# Altium PCB 多功能数字电表.PcbDoc
Units mil, origin at the board's own origin, x right, y up, seen from the top; angles counter-clockwise.
Board outline 2316.22 x 2761.4 mil, 2 copper layers (Top Layer, Bottom Layer); 30 components, 39 nets, 125 pads, 0 vias.
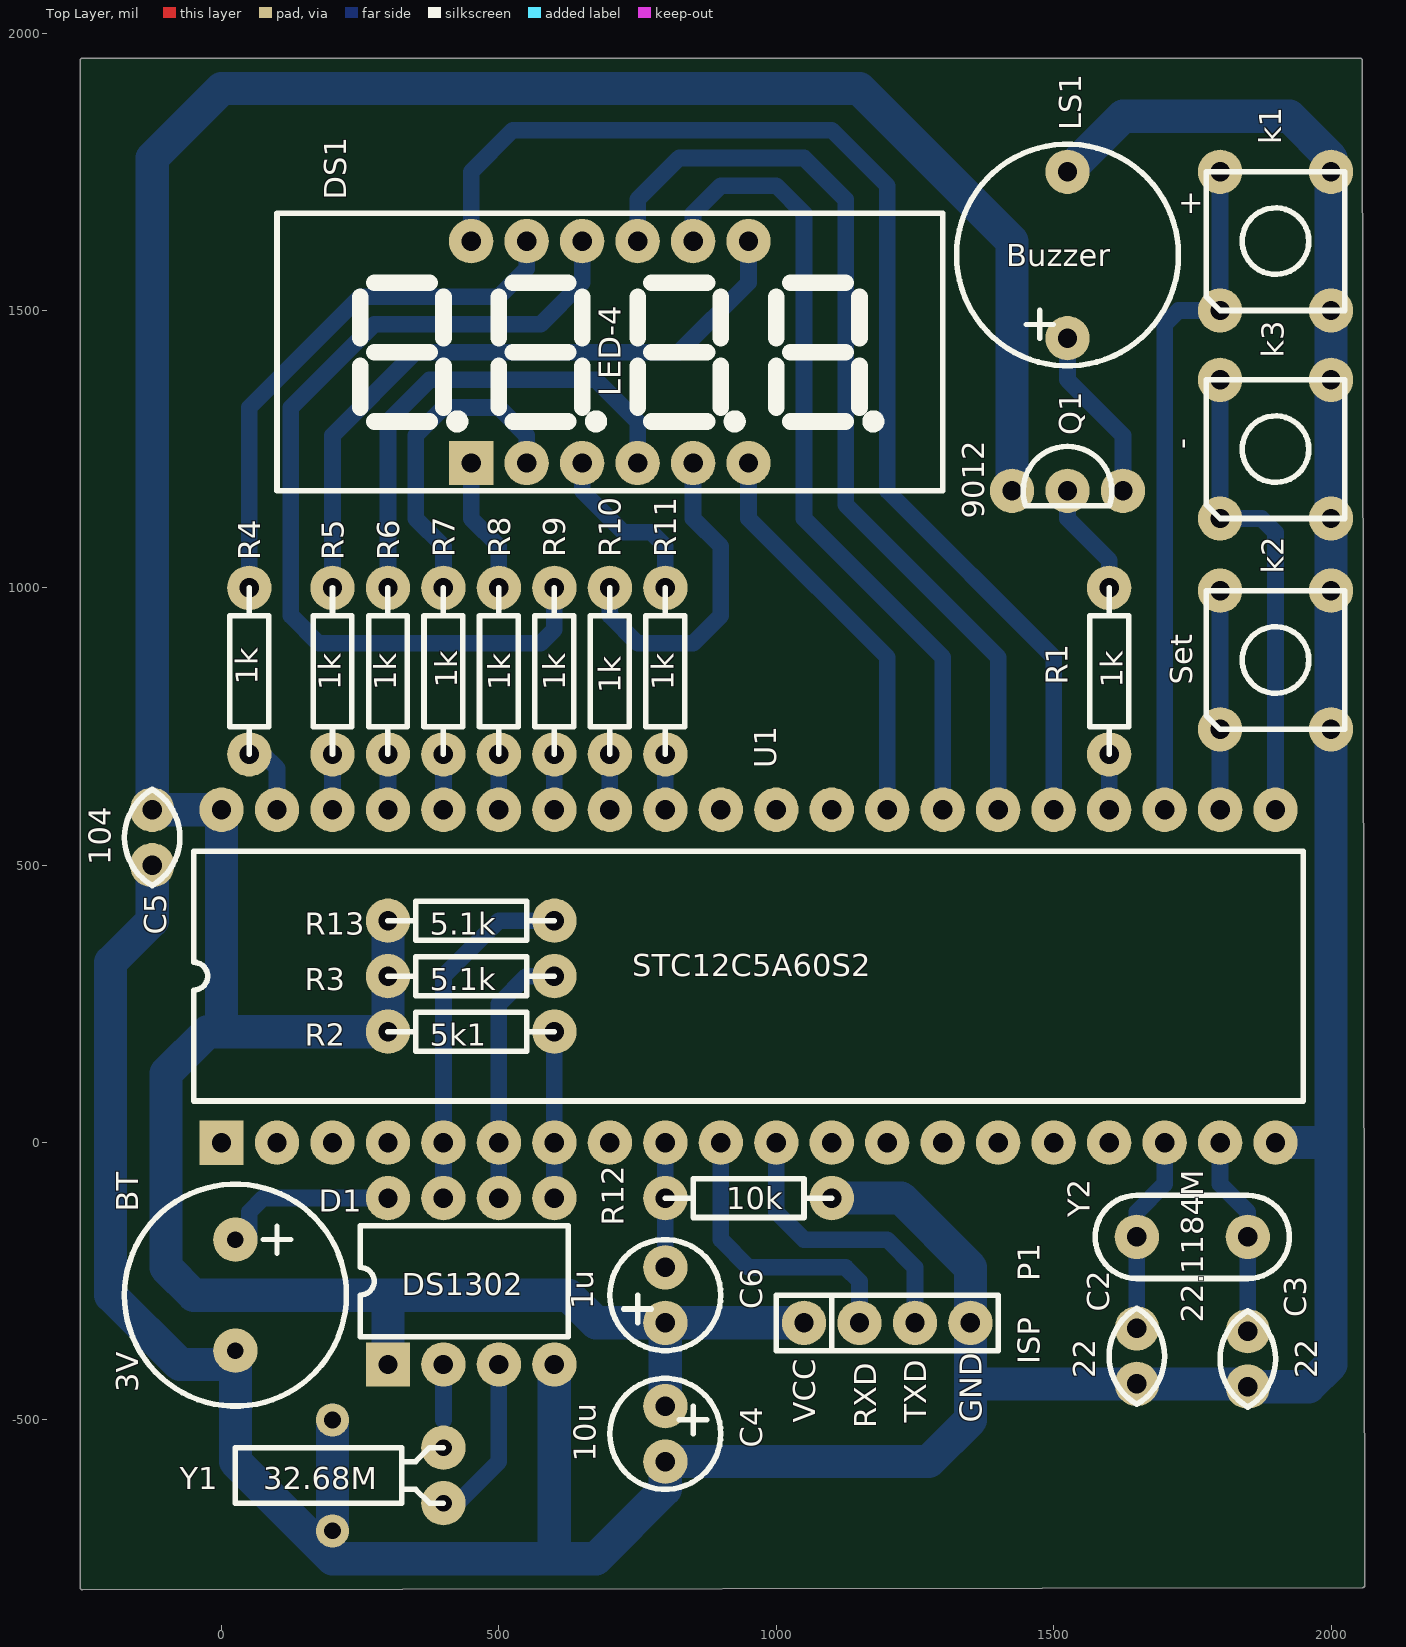
[diagram p0: Top Layer view]
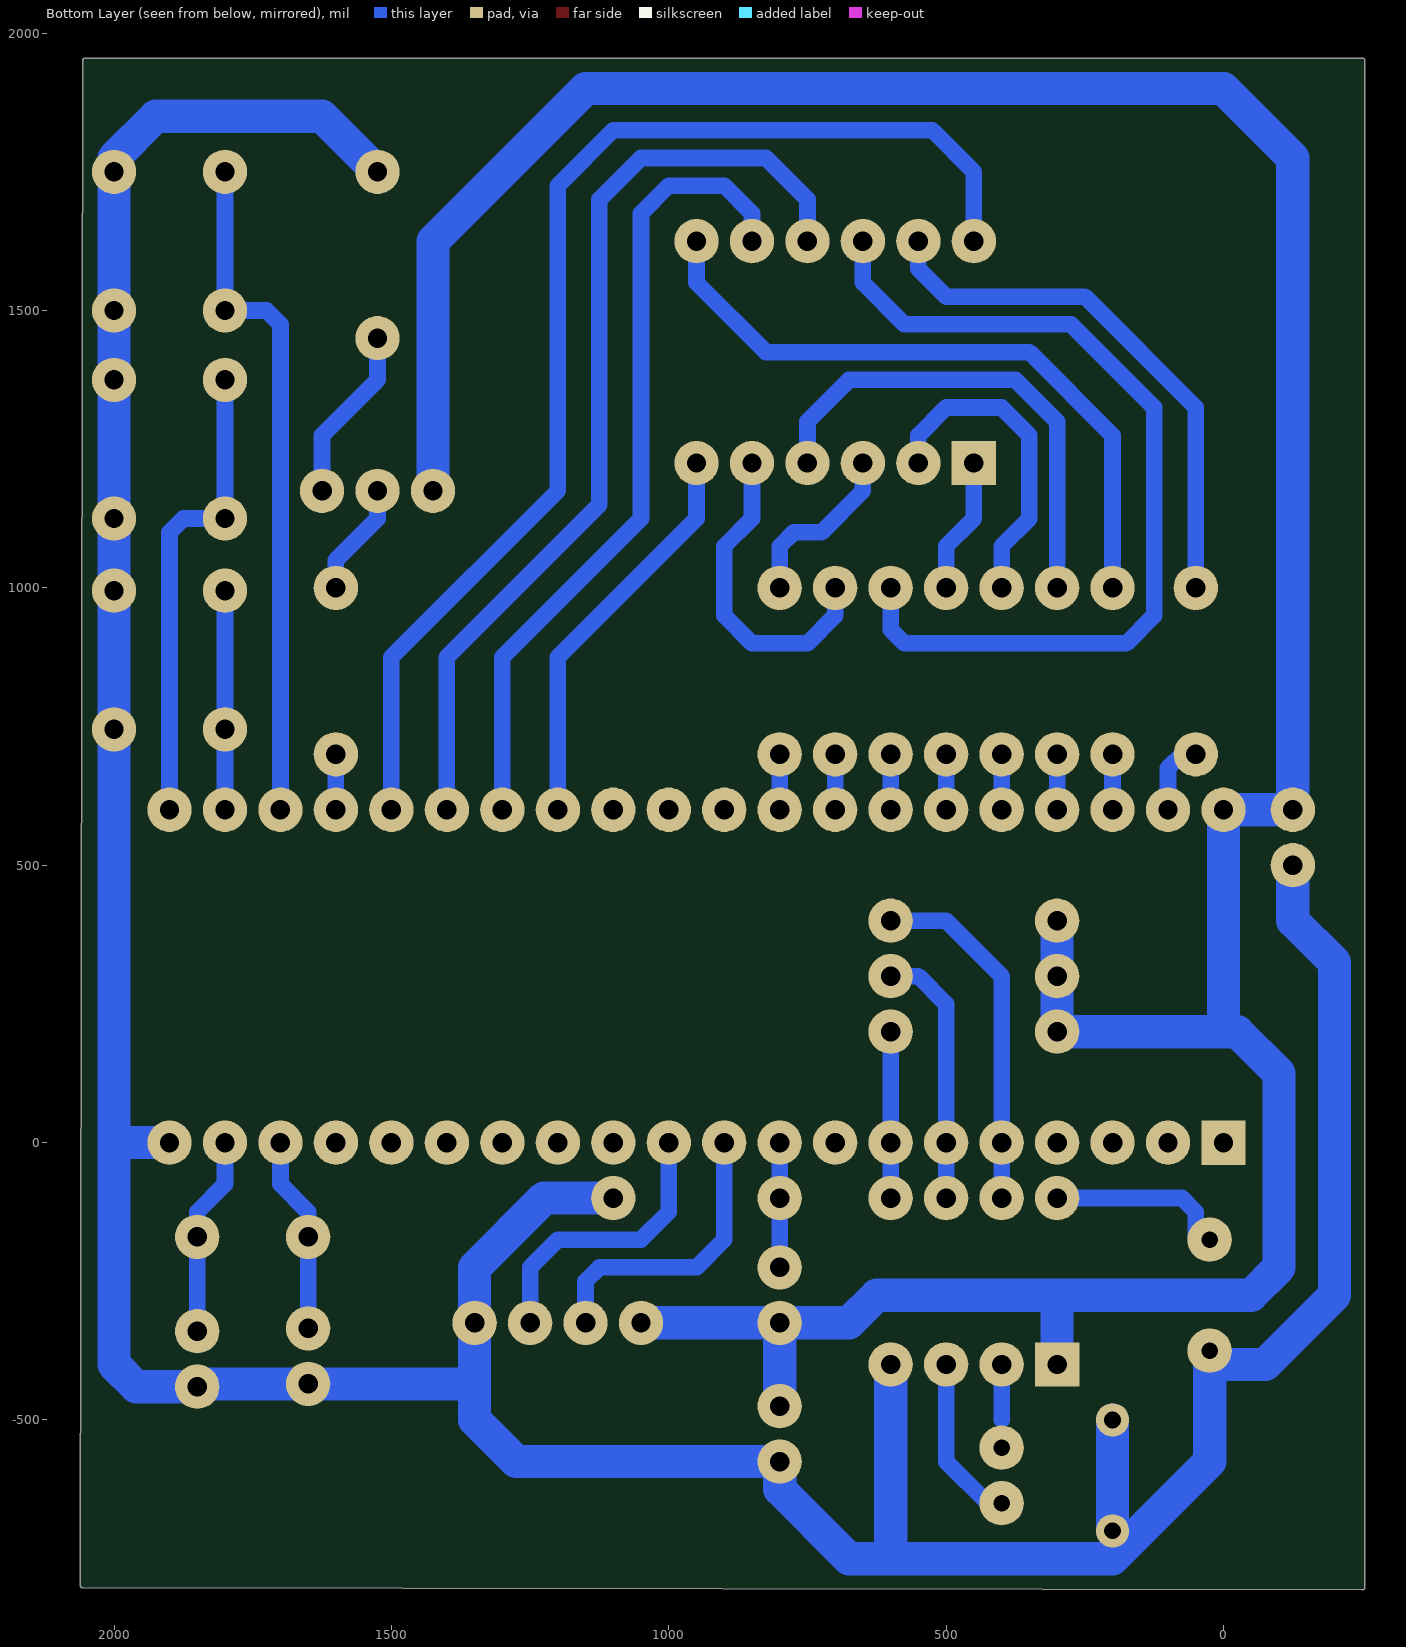
[diagram p1: Bottom Layer view, seen from below]

## Layer stack, top to bottom
Top Solder: solder mask 0.4, Solder Resist, Dk 3.5
Top Layer: signal copper 1.4
Dielectric 1: dielectric 12.6, FR-4, Dk 4.8
Bottom Layer: signal copper 1.4
Bottom Solder: solder mask 0.4, Solder Resist, Dk 3.5

## Board outline
-255.01,-801.37 ccw(c-250,-801.37) -249.99,-806.39 2056.2,-802.55 ccw(c2056.19,-797.54) 2061.21,-797.54 ccw(c2056.19,-797.54) 2061.21,-797.53 2056.64,1950.01 cw(c2051.62,1950) 2056.64,1950 2056.64,1950.01 ccw(c2051.62,1950) 2051.62,1955.02 -250,1955.02 ccw(c-250,1950) -255.01,1950

## Design rules (kind name [scope] priority, off if disabled: settings)
Clearance [All] p1: gap=10
PolygonConnect [All] p1: connectstyle=Relief reliefconductorwidth=10 reliefentries=4 polygonreliefangle="90 Angle" airgapwidth=10
RoutingVias [All] p1: holewidth=28 width=50 viastyle="Through Hole" minholewidth=28 minwidth=50 maxholewidth=28 maxwidth=50
SolderMaskExpansion [All] p1: expansion=4
Width [All] p1: maxlimit=70 minlimit=10 preferedwidth=30 minimp=50.000000 maximp=50.000000 favimp=50.000000
30 further rules are at their usual default settings.

## Components (designator, comment, footprint, x,y, rotation, side; value= is the part's Value field where it differs from the comment)
BT "3V" RB150 25,-175 r270 top
C2 "22" CAP 1650,-435 r90 top
C3 "22" CAP 1850,-440 r90 top
C4 "10u" RB.1/.2 800,-475 r270 top
C5 "104" CAP -125,500 r90 top
C6 "1u" RB.1/.2 800,-325 r90 top
D1 "DS1302" DS1302 300,-400 r0 top
DS1 "LED-4" 7SEG_036*4 450,1225 r0 top
k1 "+" SW-4 1800,1500 r0 top
k2 "Set" SW-4 1800,745 r0 top
k3 "-" SW-4 1800,1125 r0 top
LS1 "Buzzer" BUZZER 1525,1450 r90 top
P1 "ISP" SIP4 1050,-325 r0 top
Q1 "9012" TO-92 1425,1175 r0 top
R1 "1k" AXIAL-0.3 1600,1000 r270 top
R2 "5k1" AXIAL-0.3 600,200 r180 top
R3 "5.1k" AXIAL-0.3 600,300 r180 top
R4 "1k" AXIAL-0.3 50,700 r90 top
R5 "1k" AXIAL-0.3 200,700 r90 top
R6 "1k" AXIAL-0.3 300,700 r90 top
R7 "1k" AXIAL-0.3 400,700 r90 top
R8 "1k" AXIAL-0.3 500,700 r90 top
R9 "1k" AXIAL-0.3 600,700 r90 top
R10 "1k" AXIAL-0.3 700,700 r90 top
R11 "1k" AXIAL-0.3 800,700 r90 top
R12 "10k" AXIAL-0.3 800,-100 r0 top
R13 "5.1k" AXIAL-0.3 600,400 r180 top
U1 "STC12C5A60S2" DIP40 0,0 r90 top
Y1 "32.68M" 32768 400,-650 r90 top
Y2 "22.1184M" XTAL 1850,-170 r180 top

## Footprints (in the part's own frame and the unit in brackets; to place one, negate y for a bottom-side part, rotate by r counter-clockwise, add the part's x,y. Pads: shape width x height; smd on the part's side, far side on the other; paste and mask are expansions set on the pad)
7SEG_036*4 [mil]
  rect 80x80 hole 35: 1(0,0)
  round 80 hole 35: 2(100,0) 3(200,0) 4(300,0) 5(400,0) 6(500,0) 7(500,400) 8(400,400) 9(300,400) 10(200,400) 11(100,400) 12(0,400)
  silkscreen extent -350,-50 850,450
32768 [mil]
  round 80 hole 30: 1(0,0) 2(100,0)
  silkscreen extent 0,0 100,375
AXIAL-0.3 [mil]
  round 80 hole 35: 1(0,0) 2(300,0)
  silkscreen extent 0,-35 300,35
BUZZER [mil]
  round 80 hole 35: 1(0,0) 2(300,0)
  silkscreen extent -50,-200 350,200
CAP [mil]
  round 80 hole 35: 1(0,0) 2(100,0)
  silkscreen extent -37,-50 137,50
DIP40 [mil]
  rect 80x80 hole 35: 1(0,0)
  round 80 hole 35: 2(0,-100) 3(0,-200) 4(0,-300) 5(0,-400) 6(0,-500) 7(0,-600) 8(0,-700) 9(0,-800) 10(0,-900) 11(0,-1000) 12(0,-1100) 13(0,-1200) 14(0,-1300) 15(0,-1400) 16(0,-1500) 17(0,-1600) 18(0,-1700) 19(0,-1800) 20(0,-1900) 21(600,-1900) 22(600,-1800) 23(600,-1700) 24(600,-1600) 25(600,-1500) 26(600,-1400) 27(600,-1300) 28(600,-1200) 29(600,-1100) 30(600,-1000) 31(600,-900) 32(600,-800) 33(600,-700) 34(600,-600) 35(600,-500) 36(600,-400) 37(600,-300) 38(600,-200) 39(600,-100) 40(600,0)
  silkscreen extent 75,-1950 525,50
DS1302 [mil]
  rect 80x80 hole 35: 1(0,0)
  round 80 hole 35: 2(100,0) 3(200,0) 4(300,0) 5(300,300) 6(200,300) 7(100,300) 8(0,300)
  silkscreen extent -50,50 325,250
RB150 [mil]
  round 80 hole 30: 1(0,0) 2(200,0)
  silkscreen extent -100,-200 300,200
RB.1/.2 [mil]
  round 80 hole 35: 1(0,0) 2(100,0)
  silkscreen extent -50,-100 150,100
SIP4 [mil]
  round 80 hole 35: 1(0,0) 2(100,0) 3(200,0) 4(300,0)
  silkscreen extent -50,-50 350,50
SW-4 [mil]
  round 80 hole 35: 1(0,0) 1(0,250) 2(200,0) 2(200,250)
  silkscreen extent -25,0 225,250
TO-92 [mil]
  round 80 hole 35: 1(0,0) 2(100,0) 3(200,0)
  silkscreen extent 20,-27 180,80
XTAL [mil]
  round 80 hole 35: 1(0,0) 2(200,0)
  silkscreen extent -75,-75 275,75

## Part data
BT: library part Battery, "Multicell Battery"
C2 C3 C5: library part Cap, "Capacitor"
C4 C6: library part "Cap Pol1", "Polarized Capacitor (Radial)"
k1 k2 k3: library part SW-PB, "Switch"
LS1: "Magnetic Transducer Buzzer"
P1: library part "Header 4", "Header, 4-Pin"
Q1: library part 2N3906, "PNP General Purpose Amplifier"
R1 R2 R3 R4 R5 R6 R7 R8 R9 R10 R11 R12 R13: library part Res2, "Resistor"
Y1 Y2: library part XTAL, "Crystal Oscillator"

## Free pads (board coordinates)
  round 60 hole 30: 2(200,-700) 3(200,-500)

## Nets (pads, with @x,y where several pads share a name; then routed paths per layer and width w, separated by ;. In a path a pad name is that pad's centre, name@x,y a point inside that pad or via, vN(x,y) a via of type N, cw(c..) or ccw(c..) an arc to the next point about the centre after c; other vN are vias at no path point)
GND: BT.2 C2.1 C3.1 C4.2 C5.1 D1.4 k1.2 k2.2 k3.2 LS1.2 P1.4 pad.2 pad.3 R12.2 U1.20 | length 7378.1
  Bottom Layer w60: C5.1 -125,400 -200,325 -200,-275 -75,-400 25,-400 25,-575 200,-750 675,-750 800,-625 C4.2 1275,-575 1350,-500 1350,-425 ; pad.2 pad.3 ; 600,-725 D1.4 ; R12.2 1225,-100 1350,-225 P1.4 1350,-425 ; LS1.2 1625,1850 1925,1850 2000,1775 2000,1750 2000,1500 2000,1375 2000,1125 2000,995 2000,745 2000,0 ; C3.1@1845,-435 C2.1 1360,-435 1350,-425 ; C3.1 1960,-440 2000,-400 2000,0 ; U1.20 2000,0
NetBT_1: BT.1 D1.8 | length 310.4
  Bottom Layer w30: BT.1@50,-175 50,-125 75,-100 D1.8
NetC2_2: C2.2 U1.18 Y2.2 | length 355.7
  Bottom Layer w30: C2.2 Y2.2 1650,-125 1700,-75 U1.18
NetC3_2: C3.2 U1.19 Y2.1 | length 360.7
  Bottom Layer w30: U1.19 1800,-75 1850,-125 Y2.1 C3.2
NetC6_2: C6.2 R12.1 U1.9 | length 225
  Bottom Layer w30: C6.2 R12.1 U1.9
NetD1_2: D1.2 Y1.2 | length 100
  Bottom Layer w30: 400,-500 D1.2
NetD1_3: D1.3 Y1.1 | length 306.1
  Bottom Layer w30: Y1.1 425,-650 500,-575 D1.3
NetD1_5: D1.5 R2.1 U1.7 | length 300
  Bottom Layer w30: D1.5 U1.7 R2.1
NetD1_6: D1.6 R3.1 U1.6 | length 470.7
  Bottom Layer w30: D1.6 U1.6 500,250 550,300 R3.1
NetD1_7: D1.7 R13.1 U1.5 | length 641.4
  Bottom Layer w30: D1.7 U1.5 400,300 500,400 R13.1
NetDS1_1: DS1.1 R8.2 | length 245.7
  Bottom Layer w30: DS1.1 450,1125 500,1075 R8.2
NetDS1_2: DS1.2 R7.2 | length 587.1
  Bottom Layer w30: R7.2 400,1075 350,1125 350,1275 400,1325 500,1325 550,1275 DS1.2
NetDS1_3: DS1.3 R11.2 | length 316.4
  Bottom Layer w30: DS1.3 650,1175 725,1100 775,1100 800,1075 R11.2
NetDS1_4: DS1.4 R6.2 | length 887.1
  Bottom Layer w30: R6.2 300,1300 375,1375 675,1375 750,1300 DS1.4
NetDS1_5: DS1.5 R10.2 | length 587.1
  Bottom Layer w30: R10.2 700,950 750,900 850,900 900,950 900,1075 850,1125 DS1.5
NetDS1_6: DS1.6 U1.28 | length 728.6
  Bottom Layer w30: DS1.6 950,1125 1200,875 U1.28
NetDS1_7: DS1.7 R5.2 | length 1213.9
  Bottom Layer w30: R5.2 200,1275 350,1425 825,1425 950,1550 DS1.7
NetDS1_8: DS1.8 U1.27 | length 1470
  Bottom Layer w30: DS1.8 850,1675 900,1725 1000,1725 1050,1675 1050,1125 1300,875 U1.27
NetDS1_9: DS1.9 U1.26 | length 1726
  Bottom Layer w30: DS1.9 750,1700 825,1775 1050,1775 1125,1700 1125,1150 1400,875 U1.26
NetDS1_10: DS1.10 R9.2 | length 1649.3
  Bottom Layer w30: R9.2 600,925 575,900 175,900 125,950 125,1325 275,1475 575,1475 650,1550 DS1.10
NetDS1_11: DS1.11 R4.2 | length 978.6
  Bottom Layer w30: R4.2 50,1325 250,1525 500,1525 550,1575 DS1.11
NetDS1_12: DS1.12 U1.25 | length 2196.8
  Bottom Layer w30: DS1.12 450,1750 525,1825 1100,1825 1200,1725 1200,1175 1500,875 U1.25
Netk1_1: k1.1 U1.23 | length 1235.4
  Bottom Layer w30: U1.23 1700,1475 1725,1500 1800,1500 k1.1@1800,1750
Netk2_1: k2.1 U1.22 | length 395
  Bottom Layer w30: U1.22 1800,745 k2.1@1800,995
Netk3_1: k3.1 U1.21 | length 860.4
  Bottom Layer w30: k3.1@1800,1375 1800,1125 1875,1125 1900,1100 U1.21
NetLS1_1: LS1.1 Q1.3 | length 316.4
  Bottom Layer w30: LS1.1 1525,1375 1625,1275 Q1.3
NetP1_2: P1.2 U1.10 | length 531.1
  Bottom Layer w30: U1.10 900,-175 950,-225 1125,-225 1150,-250 P1.2
NetP1_3: P1.3 U1.11 | length 516.4
  Bottom Layer w30: U1.11 1000,-125 1050,-175 1200,-175 1250,-225 P1.3
NetQ1_2: Q1.2 R1.1 | length 206.1
  Bottom Layer w30: Q1.2 1525,1125 1600,1050 R1.1
NetR1_2: R1.2 U1.24 | length 100
  Bottom Layer w30: U1.24 R1.2
NetR4_1: R4.1 U1.39 | length 135.4
  Bottom Layer w30: R4.1 75,700 100,675 U1.39
NetR5_1: R5.1 U1.38 | length 100
  Bottom Layer w30: U1.38 R5.1
NetR6_1: R6.1 U1.37 | length 100
  Bottom Layer w30: U1.37 R6.1
NetR7_1: R7.1 U1.36 | length 100
  Bottom Layer w30: U1.36 R7.1
NetR8_1: R8.1 U1.35 | length 100
  Bottom Layer w30: U1.35 R8.1
NetR9_1: R9.1 U1.34 | length 100
  Bottom Layer w30: U1.34 R9.1
NetR10_1: R10.1 U1.33 | length 100
  Bottom Layer w30: U1.33 R10.1
NetR11_1: R11.1 U1.32 | length 100
  Bottom Layer w30: U1.32 R11.1
VCC: C4.1 C5.2 C6.1 D1.1 P1.1 Q1.1 R2.2 R3.2 R13.2 U1.40 | length 6313.2
  Bottom Layer w60: D1.1 300,-275 ; R13.2 R3.2 R2.2 0,200 ; C4.1 C6.1 ; P1.1 C6.1 ; Q1.1 1425,1625 1150,1900 0,1900 -125,1775 C5.2 U1.40 0,200 ; 0,200 -25,200 -100,125 -100,-225 -50,-275 300,-275 ; 300,-275 625,-275 675,-325 C6.1
pads on no net: U1.1 U1.2 U1.3 U1.4 U1.8 U1.12 U1.13 U1.14 U1.15 U1.16 U1.17 U1.29 U1.30 U1.31

## Keep-outs
Mechanical 1:
  lines w10: -250,-801.37 2056.19,-797.54 2051.62,1950 -250,1950 -250,-801.37

## Silkscreen, mask and mechanical layers (free items; w line width, h text height)
Top Overlay:
  text "VCC" at 1070,-505 h40 r90
  text "TXD" at 1270,-505 h40 r90
  text "GND" at 1370,-505 h40 r90
  text "RXD" at 1180,-515 h40 r90